# EAGLE board Scheme (EAGLE 9.7.0)

Size 213.85 x 59.69 mm. Coordinates in mm from the lower left corner, seen from the top.
Outline: 0,0 213.85,0 213.85,59.69 0,59.69 0,0
Copper layers (1*16): Top 0.035mm / dielectric 1.5mm / Bottom 0.035mm
Design rules "default": minimum track width 6mil, minimum drill 0.35mm, track to track 6mil, track to pad 6mil, pad to pad 6mil, via to via 6mil, smd to smd 6mil, copper to edge 40mil, drill to drill 6mil, minimum pad ring 10mil, minimum via ring 8mil, stop-mask expansion 4mil, vias tented up to drill 0mil, thermal gap 10mil

## Footprints (pad centres in the part's own frame; a part is rotated, then mirrored left to right if it is on the bottom)
7SEG-13 = drill 0.813 long: 1 -5.08,-7.62; 2 -2.54,-7.62; 3 0,-7.62; 4 2.54,-7.62; 5 5.08,-7.62; 6 5.08,7.62; 7 2.54,7.62; 8 0,7.62; 9 -2.54,7.62; 10 -5.08,7.62
RESAD1016W63L850D250B = drill 0.83 pad 1.43: 1 -5.08,0; 2 5.08,0
ARDUINO-UNO-R3-SHIELD = drill 1.016 pad 1.88: 3.3V 24.13,-2.54; 5V 24.13,0; A0 24.13,12.7; A1 24.13,15.24; A2 24.13,17.78; A3 24.13,20.32; A4 24.13,22.86; A5 24.13,25.4; AREF -24.13,-13.97; D2 -24.13,20.32; D3 -24.13,17.78; D4 -24.13,15.24; D5 -24.13,12.7; D6 -24.13,10.16; D7 -24.13,7.62; D8 -24.13,3.81; D9 -24.13,1.27; D10 -24.13,-1.27; D11 -24.13,-3.81; D12 -24.13,-6.35; D13 -24.13,-8.89; GND@0 24.13,2.54; GND@1 24.13,5.08; GND@2 -24.13,-11.43; IOREF 24.13,-7.62; NC 24.13,-10.16; RES 24.13,-5.08; RX -24.13,25.4; SCL -24.13,-19.05; SDA -24.13,-16.51; TX -24.13,22.86; VIN 24.13,7.62
DIP762W53P254L1969H508Q16B = drill 0.743 pad 1.343: 1 -3.81,8.89; 2 -3.81,6.35; 3 -3.81,3.81; 4 -3.81,1.27; 5 -3.81,-1.27; 6 -3.81,-3.81; 7 -3.81,-6.35; 8 -3.81,-8.89; 9 3.81,-8.89; 10 3.81,-6.35; 11 3.81,-3.81; 12 3.81,-1.27; 13 3.81,1.27; 14 3.81,3.81; 15 3.81,6.35; 16 3.81,8.89

## Placement (x,y rotation side)
DIGIT1  7SEG-CK  [7SEG-13]  108.36,30.05 0 top
DIGIT2  7SEG-CK  [7SEG-13]  121.06,30.05 0 top
R1  470  [RESAD1016W63L850D250B]  141.38,35.13 0 top
R2  470  [RESAD1016W63L850D250B]  182.02,35.13 0 top
R3  470  [RESAD1016W63L850D250B]  179.48,22.43 0 top
R4  470  [RESAD1016W63L850D250B]  182.02,19.89 0 top
R5  470  [RESAD1016W63L850D250B]  184.56,17.35 0 top
R6  470  [RESAD1016W63L850D250B]  187.1,14.81 0 top
R7  470  [RESAD1016W63L850D250B]  199.8,22.43 0 top
R8  470  [RESAD1016W63L850D250B]  202.34,19.89 0 top
R9  470  [RESAD1016W63L850D250B]  204.88,17.35 0 top
R10  470  [RESAD1016W63L850D250B]  138.84,22.43 0 top
R11  470  [RESAD1016W63L850D250B]  141.38,19.89 0 top
R12  470  [RESAD1016W63L850D250B]  143.92,17.35 0 top
R13  470  [RESAD1016W63L850D250B]  146.46,14.81 0 top
R14  470  [RESAD1016W63L850D250B]  159.16,22.43 0 top
R15  470  [RESAD1016W63L850D250B]  161.7,19.89 0 top
R16  470  [RESAD1016W63L850D250B]  164.24,17.35 0 top
U1  ARDUINO-UNO-R3-SHIELD  [ARDUINO-UNO-R3-SHIELD]  47.88,29.84 270 top
U2  74HC595_PDIP  [DIP762W53P254L1969H508Q16B]  152.81,28.78 90 top
U3  74HC595_PDIP  [DIP762W53P254L1969H508Q16B]  193.45,28.78 90 top

## Library data of the parts
DIGIT1 DIGIT2 = Tinkercad; CATEGORY: Opto-Electronic; SUB-CATEGORY: Display; TYPE: 7-Segment
R1-R16 U1-U3 = Tinkercad

## Nets
DIGIT1_A: DIGIT1.7 R14.2
DIGIT1_B: DIGIT1.6 R1.1
DIGIT1_C: DIGIT1.4 R11.1
DIGIT1_D: DIGIT1.2 R12.1
DIGIT1_DP: DIGIT1.5 R10.1
DIGIT1_E: DIGIT1.1 R13.1
DIGIT1_F: DIGIT1.9 R15.2
DIGIT1_G: DIGIT1.10 R16.2
DIGIT2_A: DIGIT2.7 R7.2
DIGIT2_B: DIGIT2.6 R2.1
DIGIT2_C: DIGIT2.4 R4.1
DIGIT2_D: DIGIT2.2 R5.1
DIGIT2_DP: DIGIT2.5 R3.1
DIGIT2_E: DIGIT2.1 R6.1
DIGIT2_F: DIGIT2.9 R8.2
DIGIT2_G: DIGIT2.10 R9.2
U1_5V: U1.5V U2.10 U2.16 U3.10 U3.16
U1_D4: U1.D4 U2.14
U1_D5: U1.D5 U2.12 U3.12
U1_D6: U1.D6 U2.11 U3.11
U1_GND: DIGIT1.3 DIGIT1.8 DIGIT2.3 DIGIT2.8 U1.GND@0 U1.GND@1 U1.GND@2 U2.8 U2.13 U3.8 U3.13
U2_Q0: R1.2 U2.15
U2_Q1: R10.2 U2.1
U2_Q2: R11.2 U2.2
U2_Q3: R12.2 U2.3
U2_Q4: R13.2 U2.4
U2_Q5: R14.1 U2.5
U2_Q6: R15.1 U2.6
U2_Q7: R16.1 U2.7
U2_Q7S: U2.9 U3.14
U3_Q0: R2.2 U3.15
U3_Q1: R3.2 U3.1
U3_Q2: R4.2 U3.2
U3_Q3: R5.2 U3.3
U3_Q4: R6.2 U3.4
U3_Q5: R7.1 U3.5
U3_Q6: R8.1 U3.6
U3_Q7: R9.1 U3.7

## Tracks (layer width: path | path; a pad name or v marks a point on that pad's centre or on a via)
DIGIT1_A  (1 unrouted)
DIGIT1_B  (1 unrouted)
DIGIT1_C  (1 unrouted)
DIGIT1_D  (1 unrouted)
DIGIT1_DP  (1 unrouted)
DIGIT1_E  (1 unrouted)
DIGIT1_F  (1 unrouted)
DIGIT1_G  (1 unrouted)
DIGIT2_A  (1 unrouted)
DIGIT2_B  (1 unrouted)
DIGIT2_C  (1 unrouted)
DIGIT2_D  (1 unrouted)
DIGIT2_DP  (1 unrouted)
DIGIT2_E  (1 unrouted)
DIGIT2_F  (1 unrouted)
DIGIT2_G  (1 unrouted)
U1_5V  (4 unrouted)
U1_D4  (1 unrouted)
U1_D5  (2 unrouted)
U1_D6  (2 unrouted)
U1_GND  (10 unrouted)
U2_Q0  (1 unrouted)
U2_Q1  (1 unrouted)
U2_Q2  (1 unrouted)
U2_Q3  (1 unrouted)
U2_Q4  (1 unrouted)
U2_Q5  (1 unrouted)
U2_Q6  (1 unrouted)
U2_Q7  (1 unrouted)
U2_Q7S  (1 unrouted)
U3_Q0  (1 unrouted)
U3_Q1  (1 unrouted)
U3_Q2  (1 unrouted)
U3_Q3  (1 unrouted)
U3_Q4  (1 unrouted)
U3_Q5  (1 unrouted)
U3_Q6  (1 unrouted)
U3_Q7  (1 unrouted)